# Altium PCB Mother_board_sauvc_2025.PcbDoc
Units mm, origin at the board's own origin, x right, y up, seen from the top; angles counter-clockwise.
Board outline 92.33 x 96.52 mm, 4 copper layers (Top Layer 1, VCC, GND, Bottom Layer 1), stack 0.603 mm thick; 33 components, 77 nets, 302 pads, 0 vias.
Unrouted connection lines stored in the file: 152.
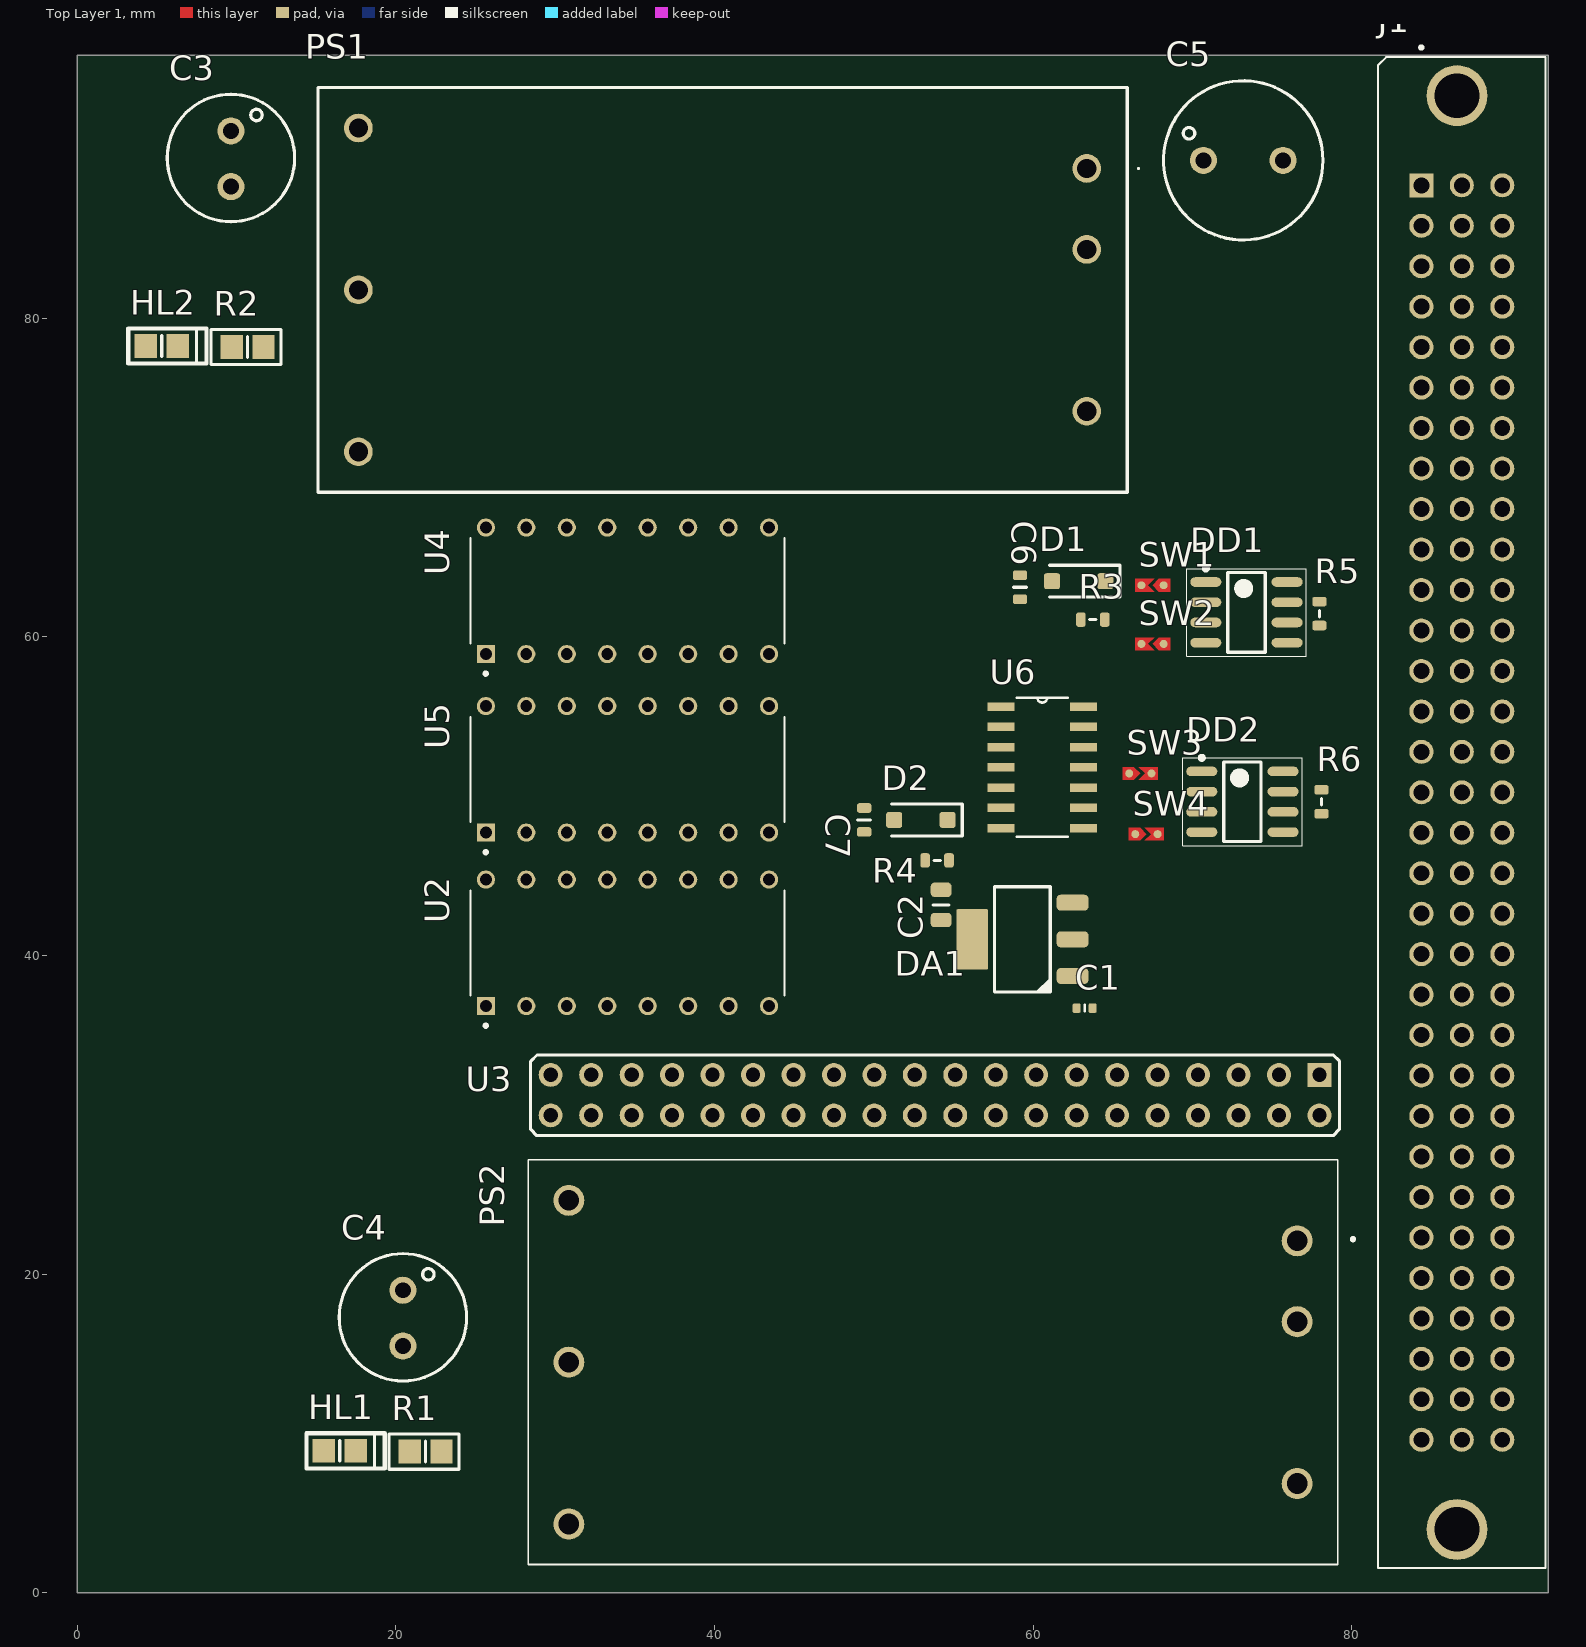
[diagram p0: Top Layer 1 view]
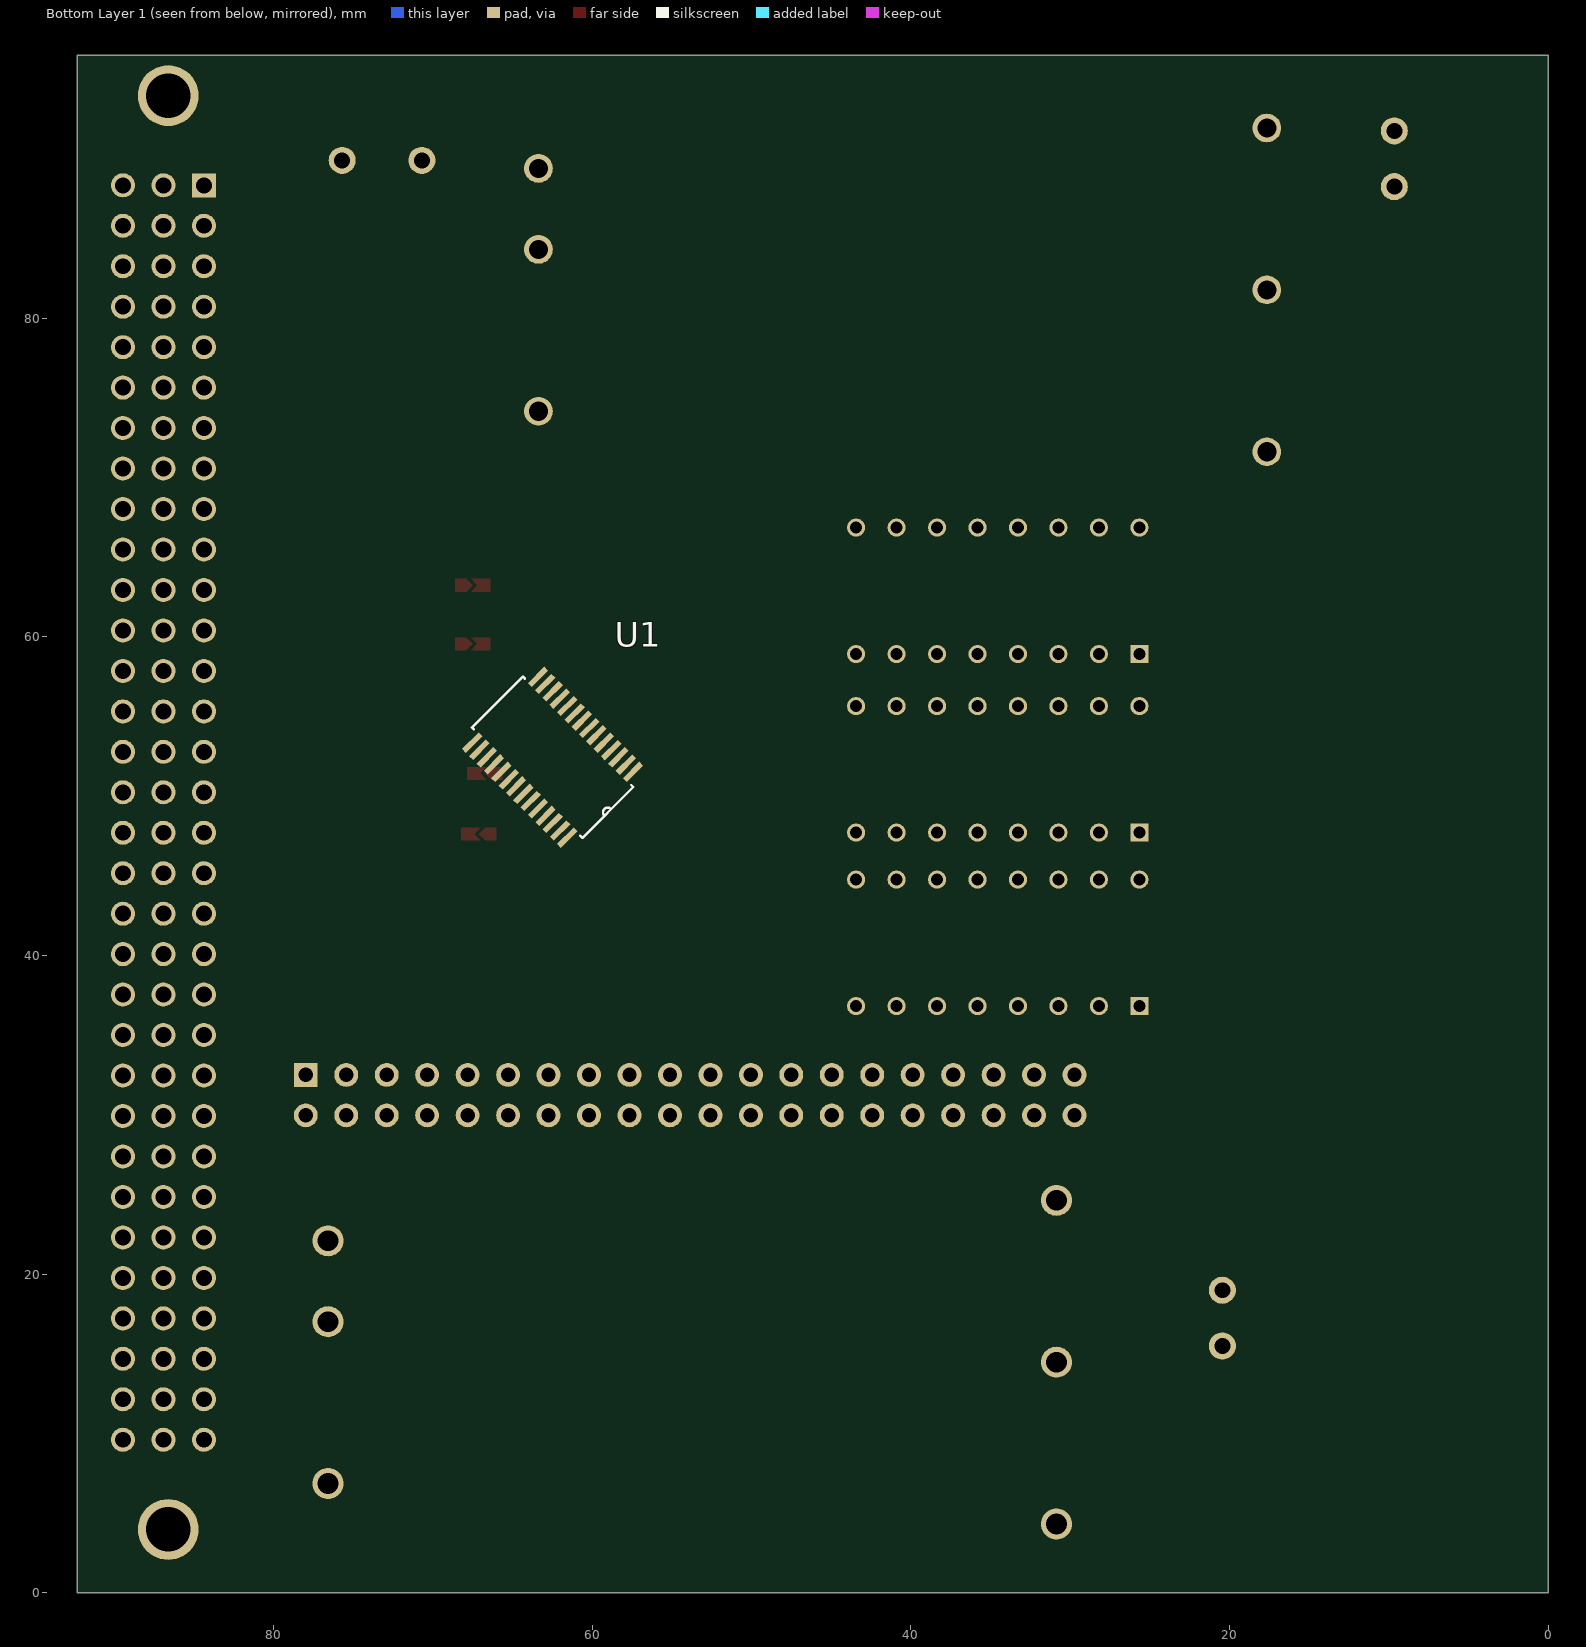
[diagram p1: Bottom Layer 1 view, seen from below]

## Layer stack, top to bottom
Top Solder: solder mask 0.0102, Solder Resist, Dk 3.5
Top Layer 1: signal copper 0.035
Dielectric 2: prepreg 0.0711, PP-006, Dk 4.1
VCC: signal copper 0.0356
Dielectric 1: dielectric 0.32, FR-4, Dk 4.8
GND: signal copper 0.0356
Dielectric 3: prepreg 0.0711, PP-006, Dk 4.1
Bottom Layer 1: signal copper 0.035
Bottom Solder: solder mask 0.0102, Solder Resist, Dk 3.5

## Board outline
0,0 92.329,0 92.329,96.52 0,96.52

## Design rules (kind name [scope] priority, off if disabled: settings)
Clearance [All] p1: gap=0.254 ignorepadtopadclearanceinfootprint=FALSE
DiffPairsRouting [All] p1: maxlimit=0.254 minlimit=0.254 mostfreqgap=0.254 toplayer_minwidth=0.381 toplayer_maxwidth=0.381 toplayer_prefwidth=0.381 midlayer1_minwidth=0.381 midlayer1_maxwidth=0.381 midlayer1_prefwidth=0.381 midlayer2_minwidth=0.381 midlayer2_maxwidth=0.381 midlayer2_prefwidth=0.381 bottomlayer_minwidth=0.381 bottomlayer_maxwidth=0.381 bottomlayer_prefwidth=0.381 maxuncoupledlength=12.7
PolygonConnect [All] p1: connectstyle=Relief reliefconductorwidth=0.254 reliefentries=4 polygonreliefangle="90 Angle" airgapwidth=0.254
RoutingVias [All] p1: holewidth=0.711 width=1.27 viastyle="Through Hole" minholewidth=0.711 minwidth=1.27 maxholewidth=0.711 maxwidth=1.27
SolderMaskExpansion [All] p1: expansion=0.102 istentingtop=FALSE
Width [All] p1: maxlimit=0.254 minlimit=0.254 preferedwidth=0.254
29 further rules are at their usual default settings.

## Classes and differential pairs
component class Power: C1 C2 C3 C4 C5 DA1 HL1 HL2 PS1 PS2 R1 R2
component class Connectors: DIN1 J1
component class RPI: C6 C7 D1 D2 DD1 DD2 R3 R4 R5 R6 SW1 SW2 SW3 SW4 U1 U2 U3 U4 U5 U6
differential pair RS485: +RS485_P -RS485_N
differential pair RS485_2: +RS485_2_P -RS485_2_N

## Components (designator, comment, footprint, x,y, rotation, side; value= is the part's Value field where it differs from the comment)
C1 "100 nF" C0402C 63.238,36.703 r180 top
C2 "10 мкФ" C0805C 54.229,43.18 r90 top
C3 "1uF" "Capacitor 8x12" 9.652,91.765 r270 top value=1000uF
C4 "1uF" "Capacitor 8x12" 20.447,18.994 r270 top value=220uF
C5 "1uF" "Capacitor 10x12" 70.692,89.916 r0 top value=1000uF
C6 "0,1мкФ" C0603C 59.182,63.119 r270 top
C7 "0,1мкФ" C0603C 49.403,48.514 r90 top
D1 "Diode" SOD-123F 62.865,63.5 r180 top
D2 "Diode" SOD-123F 52.959,48.514 r180 top
DA1 "LD1117S33TR" SOT-223 56.184,41.021 r90 top
DD1 "=Value" SOIC8N 73.396,61.544 r0 top
DD2 "=Value" SOIC8N 73.142,49.657 r0 top
HL1 "=Value" 0805D 16.383,9.017 r0 top
HL2 "=Value" 0805D 5.207,78.359 r0 top
J1 "DIN96SBSPF" CINCH_DIN96SBSPF 86.914,48.98 r90 top
PS1 "SKM30A-05" SKM30A05 63.373,89.408 r180 top
PS2 "SKM30A-12" SKM30B12 76.581,22.098 r180 top
R1 "Resistor" 0805R 21.971,8.763 r180 top value=9.1кОм
R2 "Resistor" 0805R 10.795,78.105 r180 top value=2кОм
R3 "22 к" C0603R 63.754,61.087 r180 top
R4 "22 к" C0603R 53.975,45.974 r180 top
R5 "120" C0603R 77.978,61.468 r270 top
R6 "120" C0603R 78.105,49.657 r270 top
SW1 "SW2" SW2 66.802,63.246 r0 top
SW2 "SW2" SW2 66.802,59.563 r0 top
SW3 "SW2" SW2 67.437,51.435 r180 top
SW4 "SW2" SW2 67.818,47.625 r180 top
U1 "PCA9685PW,118" SOP65P640X110-28N 62.484,52.451 r315 bottom
U2 "CD40109BE" DIP794W45P254L1969H508Q16 34.544,40.8 r90 top
U3 "RASPBERRY_PI_4B_4GB" PLD40 77.978,32.512 r270 top
U4 "CD40109BE" DIP794W45P254L1969H508Q16 34.544,62.898 r90 top
U5 "CD40109BE" DIP794W45P254L1969H508Q16 34.544,51.689 r90 top
U6 "" SOIC127P600X175-14N 60.579,51.816 r0 top

## Footprints (in the part's own frame and the unit in brackets; to place one, negate y for a bottom-side part, rotate by r counter-clockwise, add the part's x,y. Pads: shape width x height; smd on the part's side, far side on the other; paste and mask are expansions set on the pad)
0805D [mm]
  rect 1.4x1.5 smd: 1(-0.9,-0.1) 2(1.1,-0.1)
  silkscreen extent -2,-1.2 2.93,1, body extent -1.5,-0.9 1.7,0.7, height 1.11
0805R [mm]
  rect 1.4x1.5 smd: 1(-0.9,-0.1) 2(1.1,-0.1)
  silkscreen extent -2,-1.2 2.4,1, body extent -0.9,-0.7 1.1,0.5, height 0.5
C0402C [mm]
  rrect40% 0.5x0.6 smd: 1(-0.5,0) 2(0.5,0)
  silkscreen extent 0,-0.2 0,0.2, body extent -0.5,-0.25 0.5,0.25, height 0.55
C0603C [mm]
  rrect50% 0.6x0.9 smd: 1(-0.75,0) 2(0.75,0)
  silkscreen extent 0,-0.4 0,0.4, body extent -0.8,-0.4 0.8,0.4, height 0.95
C0603R [mm]
  rrect50% 0.6x0.9 smd: 1(-0.75,0) 2(0.75,0)
  silkscreen extent -0.2,0 0.2,0, body extent -0.8,-0.4 0.8,0.4, height 0.44
C0805C [mm]
  rrect50% 0.9x1.3 smd: 1(-0.95,0) 2(0.95,0)
  silkscreen extent 0,-0.5 0,0.5, body extent -1,-0.62 1,0.62, height 1
"Capacitor 8x12" [mm]
  round 1.7 hole 1: 1(0,0) 2(3.5,0)
  silkscreen extent -2.3,-4 5.7,4, body extent -2.3,-4.1 5.7,3.9, height 12.5
"Capacitor 10x12" [mm]
  round 1.7 hole 1: 1(0,0) 2(5,0)
  silkscreen extent -2.5,-5 7.5,5, body extent -2.5,-5 7.5,5, height 12.5
CINCH_DIN96SBSPF [mm]
  rect 1.508x1.508 / inner round 1.508 / far side rect 1.508x1.508 hole 1: A1(39.37,2.54)
  round 1.508 hole 1: A2(36.83,2.54) A3(34.29,2.54) A4(31.75,2.54) A5(29.21,2.54) A6(26.67,2.54) A7(24.13,2.54) A8(21.59,2.54) A9(19.05,2.54) A10(16.51,2.54) A11(13.97,2.54) A12(11.43,2.54) A13(8.89,2.54) A14(6.35,2.54) A15(3.81,2.54) A16(1.27,2.54) A17(-1.27,2.54) A18(-3.81,2.54) A19(-6.35,2.54) A20(-8.89,2.54) A21(-11.43,2.54) A22(-13.97,2.54) A23(-16.51,2.54) A24(-19.05,2.54) A25(-21.59,2.54) A26(-24.13,2.54) A27(-26.67,2.54) A28(-29.21,2.54) A29(-31.75,2.54) A30(-34.29,2.54) A31(-36.83,2.54) A32(-39.37,2.54) B1(39.37,0) B2(36.83,0) B3(34.29,0) B4(31.75,0) B5(29.21,0) B6(26.67,0) B7(24.13,0) B8(21.59,0) B9(19.05,0) B10(16.51,0) B11(13.97,0) B12(11.43,0) B13(8.89,0) B14(6.35,0) B15(3.81,0) B16(1.27,0) B17(-1.27,0) B18(-3.81,0) B19(-6.35,0) B20(-8.89,0) B21(-11.43,0) B22(-13.97,0) B23(-16.51,0) B24(-19.05,0) B25(-21.59,0) B26(-24.13,0) B27(-26.67,0) B28(-29.21,0) B29(-31.75,0) B30(-34.29,0) B31(-36.83,0) B32(-39.37,0) C1(39.37,-2.54) C2(36.83,-2.54) C3(34.29,-2.54) C4(31.75,-2.54) C5(29.21,-2.54) C6(26.67,-2.54) C7(24.13,-2.54) C8(21.59,-2.54) C9(19.05,-2.54) C10(16.51,-2.54) C11(13.97,-2.54) C12(11.43,-2.54) C13(8.89,-2.54) C14(6.35,-2.54) C15(3.81,-2.54) C16(1.27,-2.54) C17(-1.27,-2.54) C18(-3.81,-2.54) C19(-6.35,-2.54) C20(-8.89,-2.54) C21(-11.43,-2.54) C22(-13.97,-2.54) C23(-16.51,-2.54) C24(-19.05,-2.54) C25(-21.59,-2.54) C26(-24.13,-2.54) C27(-26.67,-2.54) C28(-29.21,-2.54) C29(-31.75,-2.54) C30(-34.29,-2.54) C31(-36.83,-2.54) C32(-39.37,-2.54)
  round 3.816 hole 2.8: SH1(-45,0.3) SH2(45,0.3)
  silkscreen extent -47.42,-5.25 48.12,5.25
DIP794W45P254L1969H508Q16 [mm]
  rect 1.14x1.14 / inner round 1.14 / far side rect 1.14x1.14 hole 0.74: 1(-3.97,8.89)
  round 1.14 hole 0.74: 2(-3.97,6.35) 3(-3.97,3.81) 4(-3.97,1.27) 5(-3.97,-1.27) 6(-3.97,-3.81) 7(-3.97,-6.35) 8(-3.97,-8.89) 9(3.97,-8.89) 10(3.97,-6.35) 11(3.97,-3.81) 12(3.97,-1.27) 13(3.97,1.27) 14(3.97,3.81) 15(3.97,6.35) 16(3.97,8.89)
  silkscreen extent -5.3,-9.85 3.3,9.85, body extent -3.95,-10.67 3.95,10.67, height 5.08
PLD40 [mm]
  rect 1.5x1.5 hole 0.9: 1(0,0)
  round 1.5 hole 0.9: 2(2.54,0) 3(0,-2.54) 4(2.54,-2.54) 5(0,-5.08) 6(2.54,-5.08) 7(0,-7.62) 8(2.54,-7.62) 9(0,-10.16) 10(2.54,-10.16) 11(0,-12.7) 12(2.54,-12.7) 13(0,-15.24) 14(2.54,-15.24) 15(0,-17.78) 16(2.54,-17.78) 17(0,-20.32) 18(2.54,-20.32) 19(0,-22.86) 20(2.54,-22.86) 21(0,-25.4) 22(2.54,-25.4) 23(0,-27.94) 24(2.54,-27.94) 25(0,-30.475) 26(2.54,-30.475) 27(0,-33.015) 28(2.54,-33.015) 29(0,-35.555) 30(2.54,-35.555) 31(0,-38.095) 32(2.54,-38.095) 33(0,-40.635) 34(2.54,-40.635) 35(0,-43.175) 36(2.54,-43.175) 37(0,-45.715) 38(2.54,-45.715) 39(0,-48.255) 40(2.54,-48.255)
  silkscreen extent -1.25,-49.51 3.81,1.25, body extent -1.27,-49.53 3.81,1.27, height 8.44
SKM30A05 [mm]
  round 1.8 hole 1.2: 1(0,0) 2(0,5.08) 3(0,15.24) 4(45.72,-2.54) 5(45.72,7.62) 6(45.72,17.78)
  silkscreen extent -3.3,-5.08 48.26,20.32, body extent -2.54,-5.08 48.26,20.32, height 11.3
SKM30B12 [mm]
  round 1.95 hole 1.3: 1(0,0) 2(0,5.08) 3(0,15.24) 4(45.72,-2.54) 5(45.72,7.62) 6(45.72,17.78)
  silkscreen extent -3.6,-5.08 48.26,20.32, body extent -2.54,-5.08 48.26,20.32, height 11.3
SOD-123F [mm] "SMD"
  rrect30% 1x1 smd: A(1.675,0) K(-1.675,0)
  silkscreen extent -2.6,-1 1.83,1, body extent -1.9,-0.8 1.9,0.8, height 1
SOIC8N [mm] "SOIC, 8-Leads, Body 4,90x3,90mm, Pitch 1,27mm, IPC Medium Density"
  oval 1.95x0.6 smd: 1(-2.55,1.905) 2(-2.55,0.635) 3(-2.55,-0.635) 4(-2.55,-1.905) 5(2.55,-1.905) 6(2.55,-0.635) 7(2.55,0.635) 8(2.55,1.905)
  silkscreen extent -3.75,-2.75 3.75,2.88, body extent -2,-2.5 2,2.5, height 1.75
SOIC127P600X175-14N [mil]
  rect 67x21 smd: 1(-102,150) 2(-102,100) 3(-102,50) 4(-102,0) 5(-102,-50) 6(-102,-100) 7(-102,-150) 8(102,-150) 9(102,-100) 10(102,-50) 11(102,0) 12(102,50) 13(102,100) 14(102,150)
  silkscreen extent -63,-172 63,172, body extent -118,-170 118,170, height 69
SOP65P640X110-28N [mil]
  rect 58x14 smd: 1(-115,166) 2(-115,141) 3(-115,115) 4(-115,90) 5(-115,64) 6(-115,38) 7(-115,13) 8(-115,-13) 9(-115,-38) 10(-115,-64) 11(-115,-90) 12(-115,-115) 13(-115,-141) 14(-115,-166) 15(115,-166) 16(115,-141) 17(115,-115) 18(115,-90) 19(115,-64) 20(115,-38) 21(115,-13) 22(115,13) 23(115,38) 24(115,64) 25(115,90) 26(115,115) 27(115,141) 28(115,166)
  silkscreen extent -89,-193 89,193
SOT-223 [mm]
  rrect50% 1x2 smd: 1(-2.3,-6.3) 2(0,-6.3) 3(2.3,-6.3)
  rrect10% 3.8x2 smd: 4(0,0)
  silkscreen extent -3.3,-4.9 3.3,-1.4, body extent -3.25,-6.6 3.25,0.4, height 1.8
SW2 [mm]
  round 0.5 smd paste+0 mask+0: 1(0,0) 2(1.4,0)
  Top Layer 1 region: 1.1,0.4 0.7,0 1.1,-0.4 1.8,-0.4 1.8,0.4
  Top Layer 1 region: -0.4,0.4 -0.4,-0.4 0.8,-0.4 0.4,0 0.8,0.4

## Part data
C1: library part CL05B103KA5NNNC, "SMD 0603 ; X7R; 0,01 мкФ; 25 В", Dielectric=X7R, Manufacturer=SAMSUNG, Package="SMD 0402", Voltage="25 В", ComponentLink1Description=Datasheet, Part Number=CL05B103KA5NNNC, Persent=±10%, Type=Ceramic
C2: library part CL21B106KOQNNNE, "SMD 0805; X7R; 10 мкФ; 16 В", Dielectric=X7R, Manufacturer=SAMSUNG, Package="SMD 0805", Voltage="16 В", ComponentLink1Description=Datasheet, Part Number=CL21B106KOQNNNE, Persent=±15%, Type=Ceramic
C3 C4 C5: library part Capacitor_pol
C6 C7: library part CL10B152KB8NNNC, "SMD 0603 ; X7R; 1,5 нФ; 50 В", Dielectric=X7R, Manufacturer=SAMSUNG, Package="SMD 0603", Voltage="16 В", ComponentLink1Description=Datasheet, Part Number=CL10B152KB8NNNC, Persent=±15%, Type=Ceramic
D1 D2: library part Schottky-Diode, Datasheet=https://diotec.com/de/produktliste/SBD.html, ki_description="Schottky Diode", ki_keywords=Schottky
DA1: "Linear regulator, 3V3", Manufacturer=STMicroelectronics, Part Number=LD1117S33TR, Type="Linear regulator"
DD1 DD2: library part MAX3072E, "Half-duplex", Case="soic-8(0.154 inch)", Manufacturer=MAXIM, Datasheet=https://static.chipdip.ru/lib/276/DOC000276899.pdf, Notice="True fail-safe", Rate=3.3v, Shop=https://www.chipdip.ru/product/max3072eesa
HL1: library part LED, Case=-, Color=зеленый, Datasheet=-, Manufacturer=-, Notice=-, Rate=-, Shop=-
HL2: library part LED, Case=-, Color=красный, Datasheet=-, Manufacturer=-, Notice=-, Rate=-, Shop=-
J1: "DIN 41612 socket, fully populated, 96 contacts, straight PCB mounted, press-fit pins", Package=None, Availability="In Stock", Check_prices=https://www.snapeda.com/parts/DIN96SBSPF/Cinch+Connectivity+Solutions/view-part/?ref=eda, MF="Cinch Connectivity Solutions", MP=DIN96SBSPF, Price=None, Purchase-URL=https://pricing.snapeda.com/search?q=DIN96SBSPF&ref=eda, SnapEDA_Link=https://www.snapeda.com/parts/DIN96SBSPF/Cinch+Connectivity+Solutions/view-part/?ref=snap
PS1: "Power Supply", Manufacturer_Name="Mean Well", Mouser Part Number=709-SKM30A-05, Datasheet Link=https://www.meanwell.com/webapp/product/search.aspx?prod=SKM30, Height=11.2mm, Manufacturer_Part_Number=SKM30A-05, Mouser Price/Stock=https://www.mouser.co.uk/ProductDetail/MEAN-WELL/SKM30A-05?qs=WtedIhRlNpsvgfTGPi4UAw%3D%3D
PS2: "Power Supply", Manufacturer_Name="Mean Well", Mouser Part Number=709-SKM30A-12, Arrow Part Number=SKM30A-12, Arrow Price/Stock=https://www.arrow.com/en/products/skm30a-12/mean-well-enterprises, Datasheet Link=https://www.meanwell.com/webapp/product/search.aspx?prod=SKM30, Height=11.2mm, Manufacturer_Part_Number=SKM30A-12, Mouser Price/Stock=https://www.mouser.co.uk/ProductDetail/MEAN-WELL/SKM30A-12?qs=WtedIhRlNpuG9wDURm5lSA%3D%3D
R3 R4: library part RC0603FR-0722KL, "SMD 0603; 0,1; 1%; 22 кОм", Manufacturer=Yageo, Package="SMD 0603", Power=0,1, Category=R, Part Number=RC0603FR-0722KL, Persent=1%, TCR="200 ppm"
R5 R6: library part RC0603FR-07120RL, "SMD 0603; 0,1; 1%; 120 Ом", Manufacturer=Yageo, Package="SMD 0603", Power=0,1, Category=R, Part Number=RC0603FR-07120RL, Persent=1%, TCR="200 ppm"
U1: "LED Driver IC 16 Output Linear - PWM Dimming 25mA 28-TSSOP", Package="TSSOP-28 NXP Semiconductors", Availability="In Stock", MF="NXP USA", MP=PCA9685PW,118, Price=None, Purchase-URL=https://pricing.snapeda.com/search/part/PCA9685PW,118/?ref=eda
U2 U4 U5: "Ð§ÐµÑ‚Ñ‹Ñ€ÐµÑ…ÑŠÑÐ´ÐµÑ€Ð½Ñ‹Ð¹ ÐšÐœÐžÐŸ-Ð¿Ñ€ÐµÐ¾Ð±Ñ€Ð°Ð·Ð¾Ð²Ð°Ñ‚ÐµÐ»ÑŒ Ð½Ð¸Ð·ÐºÐ¾Ð³Ð¾ Ð½Ð°Ð¿Ñ€ÑÐ¶ÐµÐ½Ð¸Ñ Ð² Ð²Ñ‹ÑÐ¾ÐºÐ¾Ðµ (Ð½Ð¾Ð¼Ð¸Ð½Ð°Ð»ÑŒÐ½Ð¾Ðµ Ð½Ð°Ð¿Ñ€ÑÐ¶ÐµÐ½Ð¸Ðµ 20 Ð’)", Package="PDIP-16 Texas Instruments", Check_prices=https://www.snapeda.com/parts/CD40109BE/Texas+Instruments/view-part/?ref=eda, MF="Texas Instruments", MP=CD40109BE, SnapEDA_Link=https://www.snapeda.com/parts/CD40109BE/Texas+Instruments/view-part/?ref=snap
U3: "BCM2711 Raspberry Pi 4 Model B 4GB - ARMÂ® CortexÂ®-A72 MPU Embedded Evaluation Board", Package=None, Availability="In Stock", Check_prices=https://www.snapeda.com/parts/RASPBERRY%20PI%204B/4GB/Raspberry+Pi/view-part/?ref=eda, MF="Raspberry Pi", MP="RASPBERRY PI 4B/4GB", Price=None, Purchase-URL="https://pricing.snapeda.com/search/part/RASPBERRY PI 4B/4GB/?ref=eda", SnapEDA_Link=https://www.snapeda.com/parts/RASPBERRY%20PI%204B/4GB/Raspberry+Pi/view-part/?ref=snap
U6: library part 74HC14D, "Inverter IC 6 Channel Schmitt Trigger 14-SOIC", Package="SO14-14 Nexperia USA Inc.", Availability="In Stock", Check_prices=https://www.snapeda.com/parts/74HC14D/Toshiba+Semiconductor+and+Storage/view-part/?ref=eda, MF=Toshiba, MP=74HC14D, Price=None, Purchase-URL=https://pricing.snapeda.com/search/part/74HC14D/?ref=eda, SnapEDA_Link=https://www.snapeda.com/parts/74HC14D/Toshiba+Semiconductor+and+Storage/view-part/?ref=snap

## Nets (pads, with @x,y where several pads share a name; then routed paths per layer and width w, separated by ;. In a path a pad name is that pad's centre, name@x,y a point inside that pad or via, vN(x,y) a via of type N, cw(c..) or ccw(c..) an arc to the next point about the centre after c; other vN are vias at no path point)
3.3V: C2.1 DA1.2 DA1.4 DD1.8 DD2.8 U6.14
5V: C1.1 C3.1 DA1.3 HL2.1 PS1.4 U1.28 U2.1 U2.16 U4.1 U4.16 U5.1 U5.16
12V: C4.1 HL1.1 PS2.4
"ethernet 1": J1.A29
"ethernet 2": J1.A30
"ethernet 3": J1.A31
"ethernet 4": J1.A32
"ethernet 5": J1.B29
"ethernet 6": J1.B30
"ethernet 7": J1.B31
"ethernet 8": J1.B32
GND: C1.2 C2.2 C3.2 C5.2 C6.2 C7.2 DA1.1 DD1.5 DD2.5 J1.A1 J1.A2 J1.A3 J1.A4 J1.A5 J1.A6 J1.A7 J1.A8 J1.A9 J1.A10 PS1.2 PS1.3 PS1.5 PS2.2 PS2.3 PS2.5 R1.1 R2.1 U1.1 U1.2 U1.3 U1.4 U1.5 U1.14 U1.23 U1.24 U1.25 U2.8 U3.6 U3.9 U3.14 U3.20 U3.25 U3.30 U3.34 U3.39 U4.8 U5.8 U6.7
GPIO16: J1.C14 U2.2 U2.7 U2.9 U2.15 U3.36 U4.2 U4.7 U4.9 U4.15 U5.2 U5.7 U5.9 U5.15
GPIO19: U3.35
GPIO20: J1.C17 U3.38
I2C1_SCL: U1.26 U3.5
I2C1_SDA: U1.27 U3.3
I2C2_SCL: J1.C3 U3.23
I2C2_SDA: J1.C4 U3.19
NetC6_1: C6.1 D1.A R3.2 U6.1
NetC7_1: C7.1 D2.A R4.2 U6.3
NetDD1_1: DD1.1 SW1.2
NetDD1_2: DD1.2 DD1.3 U6.2
NetDD1_4: DD1.4 SW2.2
NetDD2_1: DD2.1 SW3.2
NetDD2_2: DD2.2 DD2.3 U6.4
NetDD2_4: DD2.4 SW4.2
NetHL1_2: HL1.2 R1.2
NetHL2_2: HL2.2 R2.2
NetU1_6: U1.6 U2.3
NetU1_7: U1.7 U2.6
NetU1_8: U1.8 U2.10
NetU1_9: U1.9 U2.14
NetU1_10: U1.10 U4.3
NetU1_11: U1.11 U4.6
NetU1_12: U1.12 U4.10
NetU1_13: U1.13 U4.14
NetU1_15: U1.15 U5.3
NetU1_16: U1.16 U5.6
NetU1_17: U1.17 U5.10
NetU1_18: U1.18 U5.14
NetU3_2: U3.2 U3.4
OUT1: J1.B1
OUT2: J1.B2
OUT3: J1.B3
OUT4: J1.B4
OUT5: J1.B5
OUT6: J1.B6
OUT7: J1.B7
OUT8: J1.B8
OUT9: J1.B9
OUT10: J1.B10
OUT11: J1.B11
OUT12: J1.B12
PWM1: J1.C22 U2.4
PWM2: J1.C23 U2.5
PWM3: J1.C24 U2.11
PWM4: J1.C25 U2.13
PWM5: J1.C26 U4.4
PWM6: J1.C27 U4.5
PWM7: J1.C28 U4.11
PWM8: J1.C29 U4.13
PWM9: J1.C30 U5.4
PWM10: J1.C31 U5.5
PWM11: J1.B23 U5.11
PWM12: J1.B24 U5.13
RS485_2_N: DD2.7 R6.1
RS485_2_P: DD2.6 R6.2
RS485_N: DD1.7 J1.A28 R5.1
RS485_P: DD1.6 J1.A27 R5.2
UART0_RX: SW1.1 U3.10
UART0_TX: D1.K R3.1 SW2.1 U3.8
UART2_RX: SW3.1 U3.28
UART2_TX: D2.K R4.1 SW4.1 U3.27
UART3_RX: J1.C5 U3.7
UART3_TX: J1.C6 U3.29
"V bat": C5.1 J1.A11 J1.A12 J1.A13 J1.A14 J1.A15 J1.A16 J1.A17 J1.A18 J1.A19 J1.A20 PS1.1 PS2.1
pads on no net: C4.2 J1.A21 J1.A22 J1.A23 J1.A24 J1.A25 J1.A26 J1.B13 J1.B14 J1.B15 J1.B16 J1.B17 J1.B18 J1.B19 J1.B20 J1.B21 J1.B22 J1.B25 J1.B26 J1.B27 J1.B28 J1.C1 J1.C2 J1.C7 J1.C8 J1.C9 J1.C10 J1.C11 J1.C12 J1.C13 J1.C15 J1.C16 J1.C18 J1.C19 J1.C20 J1.C21 J1.C32 J1.SH1 J1.SH2 PS1.6 PS2.6 U1.19 U1.20 U1.21 U1.22 U2.12 U3.1 U3.11 U3.12 U3.13 U3.15 U3.16 U3.17 U3.18 U3.21 U3.22 U3.24 U3.26 U3.31 U3.32 U3.33 U3.37 U3.40 U4.12 U5.12 U6.5 U6.6 U6.8 U6.9 U6.10 U6.11 U6.12 U6.13

## Silkscreen, mask and mechanical layers (free items; w line width, h text height)
Mechanical 1:
  lines w0.254: 0.127,-6.604 0.127,95.25

## Dimensions
0.127,-6.604 to 92.329,0 on Mechanical 1